# EAGLE board ALL_bord (EAGLE 9.6.2)
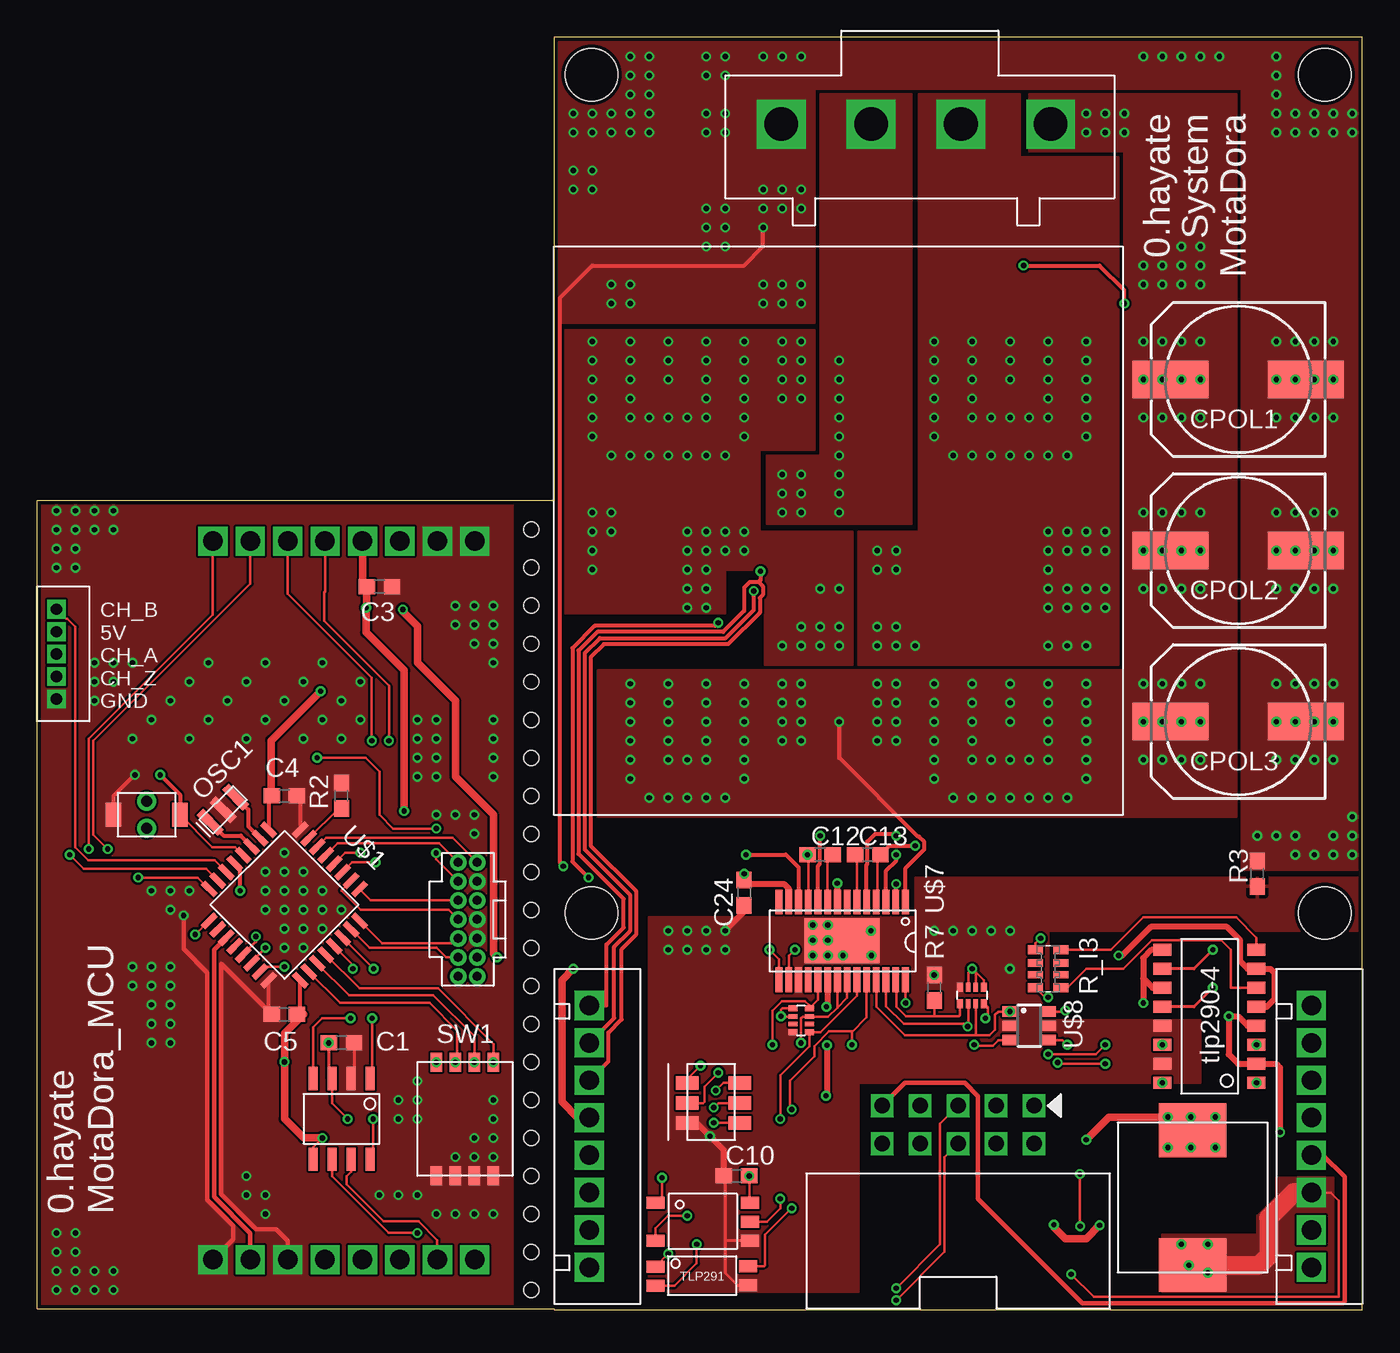
[diagram p0: board, top side]
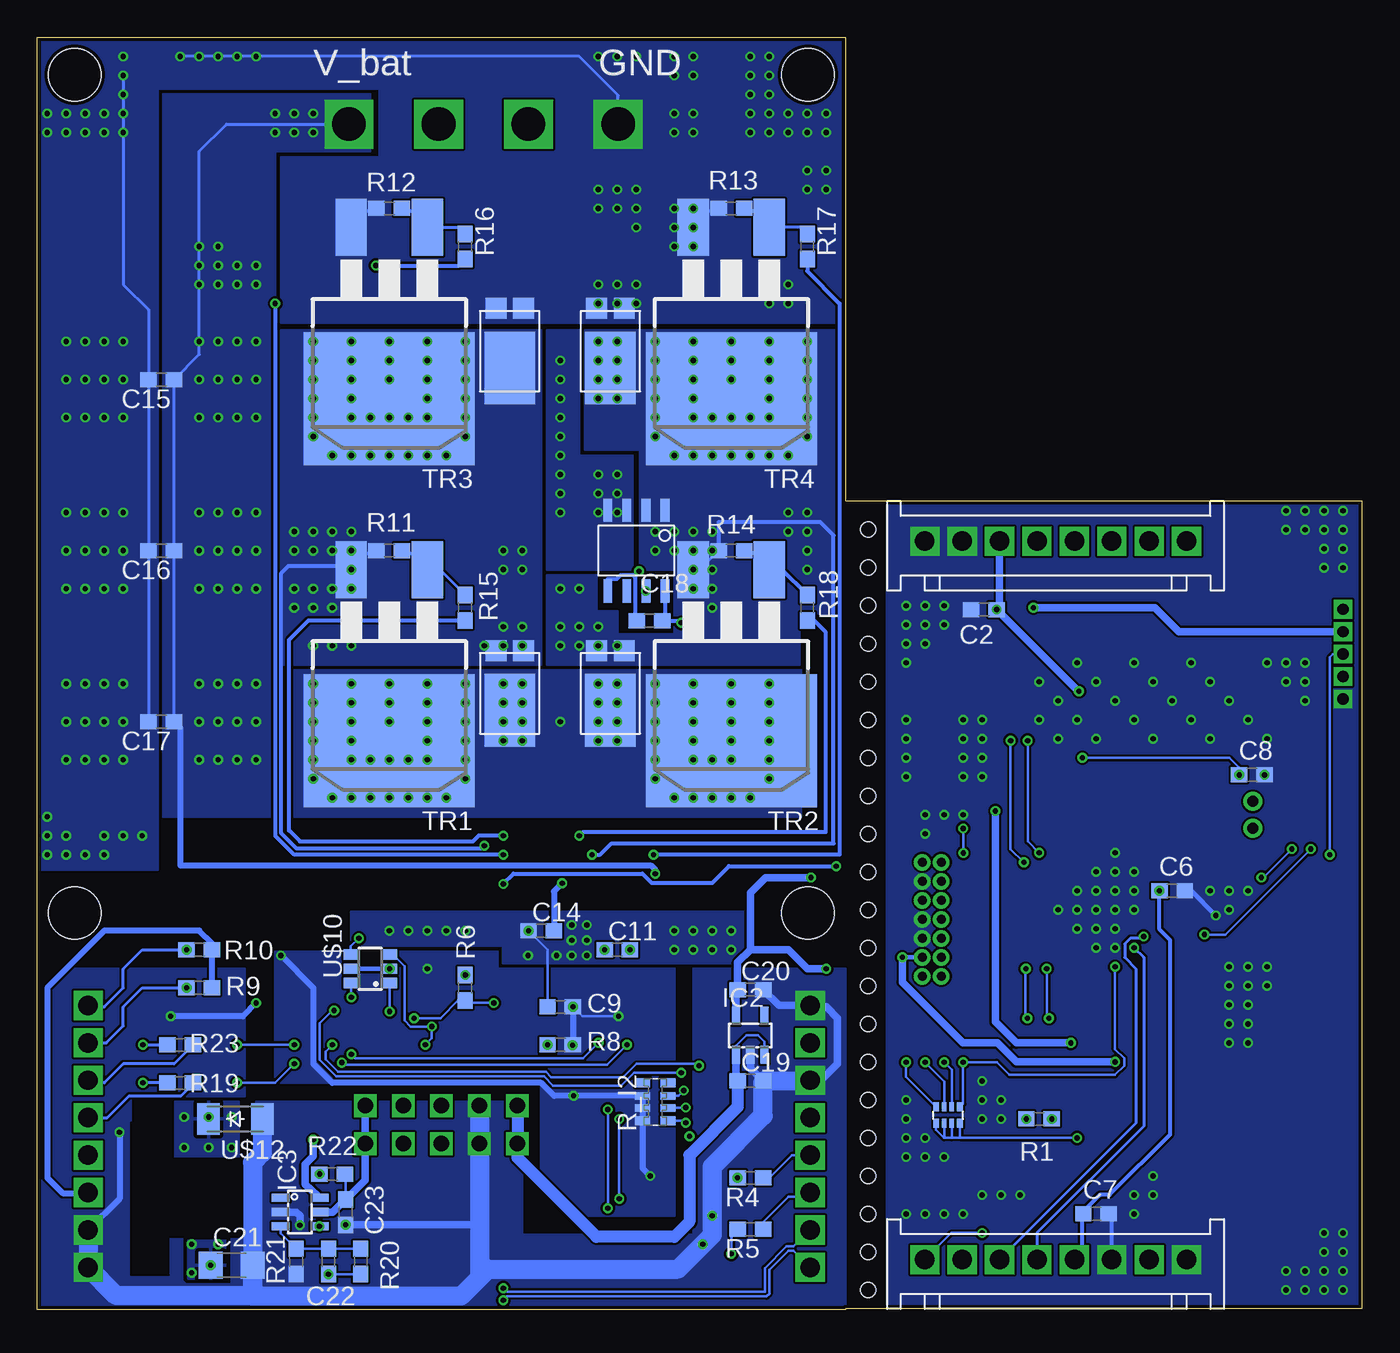
[diagram p1: board, bottom side, seen from below]

Size 88.54 x 85 mm. Coordinates in mm from the lower left corner, seen from the top.
Outline: 0,0.04 34.54,0.04 34.54,0 88.54,0 88.54,85 34.54,85 34.54,54.04 0,54.04 0,0.04
Copper layers (1*16): Top 0.035mm / dielectric 1.5mm / Bottom 0.035mm
Design rules "SeeedStudio_2layer_DRU_no_angle_20140221": minimum track width 6mil, minimum drill 12mil, track to track 6mil, track to pad 6mil, pad to pad 6mil, via to via 6mil, smd to smd 0mil, copper to edge 10mil, drill to drill 10mil, minimum pad ring 10mil, minimum via ring 6mil, stop-mask expansion 2mil, vias tented up to drill 100mil, thermal gap 10mil
Holes 3.5 mm at 86.04,82.5 37.04,82.5 37.04,26.5 86.04,26.5
Holes 1 mm at 33.02,52.11 33.02,49.57 33.02,47.03 33.02,44.49 33.02,41.95 33.02,39.41 33.02,36.87 33.02,34.33 33.02,31.79 33.02,29.25 33.02,26.71 33.02,24.17 33.02,21.63 33.02,19.09 33.02,16.55 33.02,14.01 33.02,11.47 33.02,8.93 33.02,6.39 33.02,3.85 33.02,1.31

## Footprints (pad centres in the part's own frame; a part is rotated, then mirrored left to right if it is on the bottom)
C1608 = smd 1.1 x 1: 1 -0.85,0; 2 0.85,0
C3216 = smd 1.6 x 1.8: 1 -1.4,0; 2 1.4,0
JQ_S8P = drill 1.3 square: P$1 2.5,2.7; P$2 5,2.7; P$3 7.5,2.7; P$4 10,2.7; P$5 12.5,2.7; P$6 15,2.7; P$7 17.5,2.7; P$8 20,2.7
JQ_P8P = drill 1.3 square: P$1 2.45,2.35; P$2 4.95,2.35; P$3 7.45,2.35; P$4 9.95,2.35; P$5 12.45,2.35; P$6 14.95,2.35; P$7 17.45,2.35; P$8 19.95,2.35
1014CAPA = smd 5.079 x 2.5: + 4.531,0; - -4.531,0
SOIC8 = smd 1.55 x 0.6: P$1 -2.7,1.905; P$2 -2.7,0.635; P$3 -2.7,-0.635; P$4 -2.7,-1.905; P$5 2.7,-1.905; P$6 2.7,-0.635; P$7 2.7,0.635; P$8 2.7,1.905
SOT23-5 = smd 0.55 x 1.2: 1 -0.95,-1.3; 2 0,-1.3; 3 0.95,-1.3; 4 0.95,1.3; 5 -0.95,1.3
SOT23-6 = smd 0.55 x 1.2: 1 -0.95,-1.3; 2 0,-1.3; 3 0.95,-1.3; 4 0.95,1.3; 5 0,1.3; 6 -0.95,1.3
TLP291 = smd 1.2 x 0.8: PIN1 0.411,-0.862; PIN2 0.411,-2.132; PIN3 6.601,-2.092; PIN4 6.601,-0.822
TLP290 = smd 0.8 x 1.2: 1_A 0,-6.3; 1_C 0,0; 1_E 1.27,0; 1_K 1.27,-6.3; 2_A 2.54,-6.3; 2_C 2.54,0; 2_E 3.81,0; 2_K 3.81,-6.3; 3_A 5.08,-6.3; 3_C 5.08,0; 3_E 6.35,0; 3_K 6.35,-6.3; 4_A 7.62,-6.3; 4_C 7.62,0; 4_E 8.89,0; 4_K 8.89,-6.3
SO6-5 = smd 1.2 x 0.8: 1 -3.125,1.27; 3 -3.125,-1.27; 4 3.175,-1.27; 5 3.175,0; 6 3.175,1.27
SMD_INDUCTOR = smd 3.6 x 4.5: P$1 0,0; P$2 9,0
CSTNE# = smd 0.6 x 1.95: P$1 0,0; P$2 1.2,0; P$3 2.4,0
1608 = smd 1.1 x 1: 1 -0.85,0; 2 0.85,0
1005X4RESISTOR = smd 0.4 x 0.6: 1 0.2,-0.8; 4 1.8,-0.8; 5 1.8,0.3; 8 0.2,0.3 | smd 0.3 x 0.6: 2 0.75,-0.8; 3 1.25,-0.8; 6 1.25,0.3; 7 0.75,0.3
0603X4RESISTOR = smd 0.6 x 1: 1 -1.275,-0.85; 4 1.275,-0.85; 5 1.275,0.85; 8 -1.275,0.85 | smd 0.5 x 1: 2 -0.4,-0.85; 3 0.4,-0.85; 6 0.4,0.85; 7 -0.4,0.85
DIPSW4 = smd 0.76 x 1.27: P$1 -1.27,-3.81; P$2 0,-3.81; P$3 1.27,-3.81; P$4 2.54,-3.81; P$5 2.54,3.79; P$6 1.27,3.79; P$7 0,3.79; P$8 -1.27,3.79
D2PACK = smd 2.083 x 3.81: 1 -2.54,-8.89; 3 2.54,-8.89 | smd 11.43 x 8.89: 2 0,2.54
LQFP32-7X7 = smd 1.2 x 0.4: 1 -4.3,2.8; 2 -4.3,2; 3 -4.3,1.2; 4 -4.3,0.4; 5 -4.3,-0.4; 6 -4.3,-1.2; 7 -4.3,-2; 8 -4.3,-2.8; 17 4.3,-2.8; 18 4.3,-2; 19 4.3,-1.2; 20 4.3,-0.4; 21 4.3,0.4; 22 4.3,1.2; 23 4.3,2; 24 4.3,2.8 | smd 0.4 x 1.2: 9 -2.8,-4.3; 10 -2,-4.3; 11 -1.2,-4.3; 12 -0.4,-4.3; 13 0.4,-4.3; 14 1.2,-4.3; 15 2,-4.3; 16 2.8,-4.3; 25 2.8,4.3; 26 2,4.3; 27 1.2,4.3; 28 0.4,4.3; 29 -0.4,4.3; 30 -1.2,4.3; 31 -2,4.3; 32 -2.8,4.3
TAKUTOSUITTI2 = drill 0.75: NC 2.225,-0.9; NC@2 2.225,0.9 | smd 1.05 x 1.6: P$1 0,0; P$2 4.45,0
CON_HEDA14P_1.27 = drill 0.6: 1 1.08,8.255; 2 2.35,8.255; 3 1.08,6.985; 4 2.35,6.985; 5 1.08,5.715; 6 2.35,5.715; 7 1.08,4.445; 8 2.35,4.445; 9 1.08,3.175; 10 2.35,3.175; 11 1.08,1.905; 12 2.35,1.905; 13 1.08,0.635; 14 2.35,0.635
ZH_5P = drill 0.75 square: PIN1 1.5,0; PIN2 3,0; PIN3 4.5,0; PIN4 6,0; PIN5 7.5,0
VL_4P = drill 2.25 square: P$1 3.75,-3.25; P$2 9.75,-3.25; P$3 15.75,-3.25; P$4 21.75,-3.25
TSSOP_28P_ALLEGRO = smd 5 x 3: PAD 4.906,1.942 | smd 0.45 x 1.65: PIN1 0.65,-0.65; PIN2 1.3,-0.65; PIN3 1.95,-0.65; PIN4 2.6,-0.65; PIN5 3.25,-0.65; PIN6 3.9,-0.65; PIN7 4.55,-0.65; PIN8 5.2,-0.65; PIN9 5.85,-0.65; PIN10 6.5,-0.65; PIN11 7.15,-0.65; PIN12 7.8,-0.65; PIN13 8.45,-0.65; PIN14 9.1,-0.65; PIN15 9.1,4.55; PIN16 8.45,4.55; PIN17 7.8,4.55; PIN18 7.15,4.55; PIN19 6.5,4.55; PIN20 5.85,4.55; PIN21 5.2,4.55; PIN22 4.55,4.55; PIN23 3.9,4.55; PIN24 3.25,4.55; PIN25 2.6,4.55; PIN26 1.95,4.55; PIN27 1.3,4.55; PIN28 0.65,4.55
SSOT6 = smd 0.69 x 0.99: 1 -0.95,-1.3; 2 0,-1.3; 3 0.95,-1.3; 4 0.95,1.3; 5 0,1.3; 6 -0.95,1.3
RGB_LED = smd 1.5 x 0.9: B_A 3.5,-2.7; B_K 0,-2.7; G_A 3.5,-1.35; G_K 0,-1.35; R_A 3.5,0; R_K 0,0
BOX10P-L = drill 1.02 square: P$1 5.08,2.54; P$2 5.08,0; P$3 2.54,2.54; P$4 2.54,0; P$5 0,2.54; P$6 0,0; P$7 -2.54,2.54; P$8 -2.54,0; P$9 -5.08,2.54; P$10 -5.08,0
SOD_123 = smd 1.5 x 2.1: A 1.8,0; K -1.8,0
POWERDI_5 = smd 1.39 x 1.4: 1 1.063,-0.177; 2 2.903,-0.177 | smd 3.36 x 4.86: 3 1.983,3.805

## Placement (x,y rotation side)
C1  0.1u  [C1608]  20.32,17.82 0 top
C2  10u  [C1608]  25.27,46.77 180 bottom
C3  10u  [C1608]  22.86,48.3 0 top
C4  0.1u  [C1608]  16.51,34.33 180 top
C5  4.7u  [C1608]  16.51,19.72 180 top
C6  1u  [C1608]  12.7,27.98 0 bottom
C7  10u  [C1608]  17.78,6.39 0 bottom
C8  0.1u  [C1608]  7.37,35.72 0 bottom
C9  0.1u  [C1608]  53.59,20.23 180 bottom
C10  0.1u  [C1608]  46.74,8.93 180 top
C11  1u  [C1608]  49.78,24.04 0 bottom
C12  0.22u  [C1608]  52.32,30.39 0 top
C13  0.22u  [C1608]  55.5,30.39 180 top
C14  10u  [C1608]  54.86,25.31 0 bottom
C15  0.1u  [C1608]  80.26,62.14 180 bottom
C16  0.1u  [C1608]  80.26,50.71 180 bottom
C17  0.1u  [C1608]  80.26,39.28 180 bottom
C18  0.1u  [C1608]  47.62,46.01 0 bottom
C19  4.7u  [C1608]  40.89,15.28 0 bottom
C20  2.2u  [C1608]  40.89,21.37 0 bottom
C21  100u  [C3216]  75.56,2.96 0 bottom
C22  1u  [C1608]  69.09,3.21 90 bottom
C23  2.2u  [C1608]  67.94,6.51 270 bottom
C24  0.1u  [C1608]  47.24,27.85 270 top
CON1  [JQ_S8P]  9.23,54.04 180 bottom
CON2  [JQ_S8P]  9.23,6.04 180 bottom
CON3  [JQ_P8P]  82.8,22.77 270 top
CON4  [JQ_P8P]  34.54,22.77 270 top
CPOL1  330u  [1014CAPA]  80.26,62.14 180 top
CPOL2  330u  [1014CAPA]  80.26,50.71 180 top
CPOL3  330u  [1014CAPA]  80.26,39.28 180 top
IC1  [SOIC8]  20.32,12.74 270 top
IC2  [SOT23-5]  40.89,18.32 0 bottom
IC3  [SOT23-6]  70.99,6.51 270 bottom
IC_1  [TLP291]  40.89,3.72 0 top
IC_2  [TLP290]  75.18,15.15 90 top
IC_3  [SO6-5]  44.45,5.88 0 top
L1  22u  [SMD_INDUCTOR]  77.22,11.98 270 top
OSC1  12M  [CSTNE#]  11.56,32.55 45 top
R1  10k  [1608]  21.59,12.74 180 bottom
R2  10k  [1608]  20.32,34.33 90 top
R3  0  [1608]  81.53,29.12 90 top
R4  1k  [1608]  40.89,8.8 180 bottom
R5  1k  [1608]  40.89,5.37 180 bottom
R6  2.4k  [1608]  59.94,21.5 90 bottom
R7  20k  [1608]  59.94,21.5 90 top
R8  33k  [1608]  53.59,17.69 0 bottom
R9  10k  [1608]  77.72,21.5 0 bottom
R10  10k  [1608]  77.72,24.04 0 bottom
R11  10k  [1608]  65.02,50.71 0 bottom
R12  10k  [1608]  65.02,73.57 0 bottom
R13  10k  [1608]  42.16,73.57 0 bottom
R14  10k  [1608]  42.16,50.71 0 bottom
R15  10  [1608]  59.94,46.9 90 bottom
R16  10  [1608]  59.94,71.03 90 bottom
R17  10  [1608]  37.08,71.03 90 bottom
R18  10  [1608]  37.08,46.9 90 bottom
R19  1k  [1608]  78.99,15.15 180 bottom
R20  3.3k  [1608]  66.93,3.21 270 bottom
R21  2k  [1608]  71.25,3.21 90 bottom
R22  10k  [1608]  68.83,9.05 0 bottom
R23  1k  [1608]  78.99,17.69 180 bottom
R_I1  [1005X4RESISTOR]  26.67,12.74 180 bottom
R_I2  [0603X4RESISTOR]  47.24,13.88 90 bottom
R_I3  [0603X4RESISTOR]  67.56,22.77 270 top
R_I4  10k  [1005X4RESISTOR]  50.8,18.32 90 top
R_I5  10k  [1005X4RESISTOR]  61.47,21.25 0 top
SW1  [DIPSW4]  27.94,12.74 0 top
TR1  [D2PACK]  65.02,40.55 180 bottom
TR2  [D2PACK]  42.16,40.55 180 bottom
TR3  [D2PACK]  65.02,63.41 180 bottom
TR4  [D2PACK]  42.16,63.41 180 bottom
U$1  STM32F303K_32LQFP  [LQFP32-7X7]  16.51,27.04 315 top
U$2  TAKUTOSUITTI2  [TAKUTOSUITTI2]  5.08,33.06 0 top
U$3  BOX14P  [CON_HEDA14P_1.27]  30.48,30.52 180 top
U$4  ZH_5P  [ZH_5P]  1.27,48.3 270 top
U$5  ACS711  [SOIC8]  48.51,50.71 270 bottom
U$6  VL_4P  [VL_4P]  45.97,82.46 0 top
U$7  A3921  [TSSOP_28P_ALLEGRO]  58.67,26.58 180 top
U$8  FDC6305  [SSOT6]  66.29,18.96 270 top
U$9  RGB_LED  [RGB_LED]  43.43,15.15 0 top
U$10  FDC6305  [SSOT6]  66.29,22.77 90 bottom
U$11  BOX10PBOX10P-L  [BOX10P-L]  61.54,11.09 0 top
U$12  ss2040  [SOD_123]  75.31,12.74 0 bottom
U$13  HS38382  [38X38SQ]  34.54,71.03 270 top
U$14  SBR15U30SP5  [POWERDI_5]  54.99,43.85 180 bottom
U$15  SBR15U30SP5  [POWERDI_5]  54.99,66.71 180 bottom
U$16  SBR15U30SP5  [POWERDI_5]  48.26,66.71 180 bottom
U$17  SBR15U30SP5  [POWERDI_5]  48.26,43.85 180 bottom

## Library data of the parts
C1-C24 = rcl; SPICEPREFIX: C
CON1-CON4 U$3 U$4 U$6 U$11 = user_conector
CPOL1-CPOL3 L1 R1-R23 R_I1-R_I5 = user_rcl
IC1-IC3 IC_1-IC_3 U$1 U$5 U$7 = user_ic
OSC1 = user_osc
SW1 U$2 = user_swich
TR1-TR4 U$8 U$10 = user_tr_fet_igbt
U$9 = user_leds
U$12 U$14-U$17 = user_diode
U$13 = user_heatshink

## Nets
5V: C19.1 CON3.P$5 IC2.1 IC2.3 U$11.P$9 U$11.P$10
12V: C23.1 IC3.5 R22.2 U$11.P$1 U$11.P$2
+3V1: C21.1 C22.1 CON3.P$6 L1.P$2 R9.2 R10.2 R20.2
+3V3: C2.1 C4.2 C5.1 CON1.P$6 IC1.P$5 R_I1.5 R_I1.6 R_I1.7 R_I1.8 U$1.1 U$1.17 U$3.3
+5V: C1.1 C3.1 CON1.P$5 IC1.P$3 R1.1 U$4.PIN2
A_CH: U$1.7 U$4.PIN3
B_CH: U$1.6 U$4.PIN1
CAN_N: CON2.P$8 IC1.P$6
CAN_N1: CON4.P$8 U$11.P$6
CAN_P: CON2.P$7 IC1.P$7
CAN_P1: CON4.P$7 U$11.P$5
CAN_RX: IC1.P$4 U$1.21
CAN_TX: IC1.P$1 U$1.22
COAST: CON1.P$3 U$1.28
COAST1: IC_2.2_C R_I4.3 U$7.PIN21 U$7.PIN22
COAST_IN: CON3.P$3 R23.1
DIR: CON1.P$4 U$1.27
DIR1: IC_2.1_C R_I4.4 U$7.PIN19
DIR_IN: CON3.P$4 R19.1
FF1: CON1.P$2 U$1.8
FF1_IN: CON3.P$2 IC_2.3_C R9.1
FF1O: IC_2.3_K R_I3.5
FF2: CON1.P$1 U$1.9
FF2_IN: CON3.P$1 IC_2.4_C R10.1
FF2O: IC_2.4_K R_I3.8
FF3: R_I5.2 U$7.PIN26 U$8.3 U$10.3
FF4: R_I5.3 U$7.PIN25 U$8.1 U$10.1
GHA: R18.1 U$7.PIN10
GHB: R15.1 U$7.PIN5
GLA: R17.1 U$7.PIN12
GLB: R16.1 U$7.PIN3
GND: C1.2 C2.2 C3.2 C4.1 C5.2 C6.2 C7.2 C8.2 CON1.P$7 CON1.P$8 CON2.P$1 CON2.P$3 IC1.P$2 OSC1.P$2 R2.2 SW1.P$1 SW1.P$2 SW1.P$3 SW1.P$4 U$1.16 U$1.32 U$2.P$1 U$3.5 U$3.7 U$3.11 U$4.PIN5
GND1: C15.2 C16.2 C17.2 CPOL1.- CPOL2.- CPOL3.- R3.2 R12.1 R13.1 TR3.3 TR4.3 U$6.P$1 U$7.PIN2 U$15.1 U$15.2 U$16.1 U$16.2
GNDI: C9.2 C10.2 C14.1 C24.2 IC_1.PIN3 IC_2.1_E IC_2.2_E IC_3.4 R3.1 R6.2 R7.2 R_I4.8 R_I5.8 U$7.PAD U$7.PIN17 U$8.2 U$8.5 U$9.B_K U$10.2 U$10.5
GNDINT: C18.1 C19.2 C20.2 C21.2 C23.2 CON3.P$7 CON3.P$8 CON4.P$1 CON4.P$3 IC2.2 IC3.2 IC_1.PIN2 IC_2.1_K IC_2.2_K IC_2.3_E IC_2.4_E IC_3.3 R21.1 U$5.P$5 U$11.P$7 U$11.P$8 U$12.A
ID1: R_I1.1 SW1.P$8 U$1.15
ID2: R_I1.2 SW1.P$7 U$1.18
ID3: R_I1.3 SW1.P$6 U$1.19
ID4: R_I1.4 SW1.P$5 U$1.20
M: U$5.P$3 U$5.P$4 U$6.P$2
N$1: OSC1.P$1 U$1.3
N$2: OSC1.P$3 U$1.2
N$3: R2.1 U$1.31
N$4: U$8.6 U$9.G_K
N$5: U$8.4 U$9.R_K
N$6: IC3.6 L1.P$1 U$12.K
N$7: IC1.P$8 R1.2
N$8: R_I2.1 U$9.B_A
N$9: R_I2.2 U$9.G_A
N$10: R_I2.3 U$9.R_A
N$11: R_I3.1 U$10.4
N$12: R_I3.4 U$10.6
N$13: IC_3.1 R4.2
N$16: IC_1.PIN1 R5.2
N$17: IC_2.1_A R19.2
N$18: IC_2.2_A R23.2
N$19: C11.1 U$7.PIN16
N$20: C11.2 U$7.PIN15
N$21: C12.2 U$7.PIN9
N$22: C13.2 U$7.PIN6
N$23: C14.2 U$7.PIN8
N$24: C22.2 IC3.3 R20.1 R21.2
N$25: R13.2 R17.2 TR4.1
N$26: R14.2 R18.2 TR2.1
N$27: R11.2 R15.2 TR1.1
N$28: R12.2 R16.2 TR3.1
N$31: IC3.4 R22.1
NRST: C8.1 U$1.4 U$2.P$2 U$3.12
PWM: CON2.P$5 U$1.14
PWM1: IC_3.5 R_I4.1 U$7.PIN23
PWM_IN: CON4.P$5 R4.1
RDEAD: R7.1 R_I5.1 U$7.PIN27
RESET: CON2.P$6 U$1.13
RESET1: IC_1.PIN4 R8.1 U$7.PIN24
RESET_IN: CON4.P$6 R5.1
SA: C12.1 R14.1 TR2.3 TR4.2 U$5.P$1 U$5.P$2 U$7.PIN11 U$16.3 U$17.1 U$17.2
SB: C13.1 R11.1 TR1.3 TR3.2 U$6.P$3 U$7.PIN4 U$14.1 U$14.2 U$15.3
SENS_VCC: C18.2 C20.1 CON4.P$4 IC2.5 U$5.P$8
T_JCLK/SWCLK: U$1.24 U$3.6
T_JTDI: U$1.25 U$3.10
T_JTDO/SWO: U$1.26 U$3.8
T_JTMS/SWDIO: U$1.23 U$3.4
T_VCP_RX: U$1.30 U$3.13
T_VCP_TX: U$1.29 U$3.14
V5: C9.1 C10.1 IC_2.3_A IC_2.4_A IC_3.6 R8.2 R_I2.6 R_I2.7 R_I2.8 R_I4.5 R_I4.6 R_I5.5 R_I5.6 R_I5.7 U$7.PIN20
VDD: C15.1 C16.1 C17.1 C24.1 CPOL1.+ CPOL2.+ CPOL3.+ TR1.2 TR2.2 U$6.P$4 U$7.PIN1 U$7.PIN13 U$14.3 U$17.3
VDDA: C6.1 C7.1 CON2.P$4 U$1.5
VDSTH: R6.1 R_I5.4 U$7.PIN28
VIOUT: CON2.P$2 U$1.11
VIOUT1: CON4.P$2 U$5.P$7

## Tracks (layer width: path | path; a pad name or v marks a point on that pad's centre or on a via)
5V
  Top 0.305: U$11.P$9 57.99,15.15 61.98,15.15 62.87,14.27 62.87,7.4 69.85,0.42 87.25,0.42 87.38,0.55 87.38,8.86 85.92,10.32 CON3.P$5
  Bottom 0.152: IC2.3 39.94,17.88 40.39,18.32 41.15,18.32 41.84,17.63 IC2.1 | C19.1 41.74,15.37 41.84,15.47
  Bottom 0.508: 41.84,15.47 IC2.1
  Bottom 0.813: C19.1 41.74,13.54 44.96,10.32 44.96,5.88 45.97,4.86 51.18,4.86 56.46,10.15 U$11.P$10 U$11.P$9
12V
  Bottom 0.152: R22.2 67.94,9.02 C23.1
  Bottom 0.508: U$11.P$1 U$11.P$2 66.62,8.65 67.91,7.36 C23.1 68.8,6.51 IC3.5
+3V1  (via drill 0.35)
  Top 0.152: 78.49,2.98 L1.P$2 77.2,2.96 v76.96,2.96 | v69.09,2.36 70.61,0.84 87,0.84 87,7.28 86.45,7.82 CON3.P$6
  Top 1.27: 78.49,2.98 81.68,2.98 82.3,3.59 82.3,6.13 83.98,7.82 CON3.P$6
  Bottom 0.152: C21.1 v76.96,2.96 | v69.09,2.36 R20.2
  Bottom 0.406: R9.2 R10.2 76.87,24.46 77.72,25.31 84.07,25.31 87.88,21.5 87.88,8.8 86.86,7.78 85.19,7.78 CON3.P$6
  other vias: 78.23,4.35 78.23,2.45 76.45,4.35
  pour Bottom: 78.49,4.61 78.49,2.07 76.2,2.07 75.95,2.32 75.95,4.61
  pour Top (no thermals): 82.8,8.8 86.61,8.8 86.61,1.18 75.18,1.18 75.18,4.99 81.53,4.99 81.53,6.26 82.8,7.53
+3V3  (via drill 0.35)
  Top 0.152: v19.05,11.47 18.41,10.83 IC1.P$5
  Top 0.254: C4.2 15.58,34.24 15.45,34.12 U$1.1 | C5.1 17.57,19.93 U$1.17
  Top 0.305: 17.78,19.72 C5.1
  Top 0.508: 15.58,34.24 15.62,34.29 15.62,38.01 v18.92,41.31 | 17.78,19.72 16.51,18.45 v16.51,16.55 16.51,12.74 17.78,11.47 v19.05,11.47 | C2.1 24.42,46.65 25.4,45.67 25.4,43.22 27.94,40.68 27.94,35.6 30.48,33.06 30.48,23.78 v30.73,23.53
  Bottom 0.152: R_I1.5 28.47,12 27.94,11.47 | 27.94,11.47 27.92,11.49 R_I1.6 | 26.8,11.47 27.43,11.47 | 27.43,11.47 27.94,11.47 | R_I1.7 27.43,12.43 27.43,11.47 | R_I1.8 26.87,11.54 26.8,11.47 | 26.8,11.47 v19.05,11.47
  Bottom 0.305: U$3.3 v30.73,23.53
  Bottom 0.508: CON1.P$6 24.23,46.97 C2.1 18.96,41.31 v18.92,41.31 | v16.51,16.55 23.11,16.55 24.38,17.82 26.67,17.82 30.73,21.88 v30.73,23.53
  other vias: 24.42,46.77
+5V  (via drill 0.35)
  Top 0.152: R1.1 19.68,13.79 19.68,15.28 IC1.P$3
  Top 0.203: C1.1 19.47,15.49 19.68,15.28
  Top 0.508: CON1.P$5 21.73,48.58 C3.1 22.01,46.9 v21.97,46.9 21.97,45.25 24.51,42.71 v24.51,33.31
  Bottom 0.508: U$4.PIN2 12.24,45.3 13.84,46.9 v21.97,46.9 | C1.1 23.11,17.82 24.51,19.21 v24.51,33.31
  other vias: 20.74,12.74 19.47,17.82
A_CH  (via drill 0.35)
  Top 0.152: v2.16,30.39 3.1,29.45 11.27,29.45 U$1.7
  Bottom 0.152: v2.16,30.39 2.16,43.6 1.96,43.8 U$4.PIN3
B_CH
  Top 0.152: U$4.PIN1 1.91,46.16 1.99,46.16 2.54,45.61 2.54,30.87 3.4,30.01 11.43,30.01 11.73,30.01 11.84,30.01 U$1.6
CAN_N  (via drill 0.35)
  Top 0.152: IC1.P$6 19.68,8.92 23.49,5.12 v25.4,5.12
  Bottom 0.152: CON2.P$8 27.45,5.12 v25.4,5.12
CAN_N1  (via drill 0.35)
  Top 0.152: v57.4,0.62 60.63,3.85 60.63,10.17 U$11.P$6
  Bottom 0.152: CON4.P$8 37.99,3.92 38.35,3.92 39.62,2.65 39.62,1.05 39.8,0.88 57.15,0.88 v57.4,0.62
CAN_P
  Top 0.152: IC1.P$7 20.95,9.22 20.66,8.92 20.66,8.38 23.13,5.91 25.47,5.91 26.73,4.64 CON2.P$7
CAN_P1  (via drill 0.35)
  Top 0.152: v57.4,1.43 60.33,4.35 60.33,12.41 U$11.P$5
  Bottom 0.152: CON4.P$7 37.99,4.22 38.48,4.22 39.93,2.77 39.93,1.18 57.15,1.18 v57.4,1.43
CAN_RX  (via drill 0.35)
  Top 0.152: U$1.21 21.08,23.03 v21.08,22.77 | v20.93,19.47 19.02,19.47 18.41,18.86 IC1.P$4
  Bottom 0.152: v21.08,22.77 21.08,19.47 v20.93,19.47
CAN_TX  (via drill 0.35)
  Top 0.152: U$1.22 v22.47,22.77 v22.48,22.77 | v22.38,19.47 22.38,15.59 IC1.P$1
  Bottom 0.152: v22.48,22.77 22.5,22.74 22.5,19.59 v22.38,19.47
COAST  (via drill 0.35)
  Top 0.152: U$1.28 20.56,30.52 v21.59,30.52 | v22.35,38.01 22.35,42.2 16.73,47.82 CON1.P$3
  Bottom 0.152: v21.59,30.52 22.35,31.28 v22.35,38.01
COAST1  (via drill 0.35)
  Top 0.152: 53.47,20.17 U$7.PIN21 | U$7.PIN22 54.12,20.82 53.47,20.17 | 53.47,20.17 52.85,19.55 51.63,19.55 R_I4.3 51.16,19.57 51.04,19.46 v51.04,17.82 | v67.56,17.05 70.74,17.05 v71.37,17.69
  Bottom 0.152: v51.04,17.82 52.06,16.8 67.31,16.8 v67.56,17.05 | v71.37,17.69 IC_2.2_C
  other vias: 75.18,17.69
COAST_IN
  Bottom 0.203: R23.1 79.41,16.42 82.8,16.42 84.07,15.15 84.98,15.15 CON3.P$3
DIR  (via drill 0.35)
  Top 0.152: U$1.27 21.05,29.88 v22.61,29.88 | CON1.P$4 19.23,47.97 19.18,47.92 19.18,46.01 23.5,41.69 v23.5,38.01
  Bottom 0.152: v23.5,38.01 23.5,30.77 v22.61,29.88
DIR1  (via drill 0.35)
  Top 0.152: U$7.PIN19 52.17,20.7 R_I4.4 51.6,20.32 51.31,20.61 49.78,20.61 49.15,19.98 49.15,17.7 v49.14,17.69 | v71.37,16.42 68.28,16.42 v68.2,16.5
  Bottom 0.152: v68.2,16.5 68.07,16.37 50.46,16.37 v49.14,17.69 | IC_2.1_C 72.64,15.15 v71.37,16.42
  other vias: 75.18,15.15
DIR_IN
  Bottom 0.203: CON3.P$4 83.86,12.82 82.42,14.27 78.94,14.27 78.14,15.06 R19.1
FF1  (via drill 0.35)
  Top 0.152: v4.7,30.77 3.73,31.74 3.73,38.01 14.23,48.51 CON1.P$2 | U$1.8 10.72,28.87 v6.73,28.87
  Bottom 0.152: v6.73,28.87 6.6,28.87 v4.7,30.77
FF1_IN  (via drill 0.35)
  Top 0.203: R9.1 77.3,20.23 IC_2.3_C
  Bottom 0.203: CON3.P$2 83.94,17.82 82.8,18.96 82.8,20.23 81.53,21.5 R9.1
  other vias: 78.57,21.5
FF1O
  Top 0.152: R_I3.5 68.83,21.49 70.1,22.77 72.59,22.77 74.49,24.67 79.13,24.67 79.76,24.04 79.76,21.5 IC_2.3_K
FF2  (via drill 0.35)
  Top 0.152: CON1.P$1 11.73,46.44 3.43,38.14 v3.43,30.77 | U$1.9 11.46,25.98 v10.54,25.06
  Bottom 0.152: v10.54,25.06 9.14,25.06 v3.43,30.77
FF2_IN  (via drill 0.35)
  Top 0.203: R10.1 77.3,22.77 IC_2.4_C
  Bottom 0.203: CON3.P$1 85.06,20.23 84.07,20.23 82.8,21.5 82.8,22.77 81.53,24.04 R10.1
  other vias: 78.57,24.04
FF2O
  Top 0.152: R_I3.8 71.76,24.04 73.91,26.2 80.14,26.2 81.48,24.85 IC_2.4_K
FF3  (via drill 0.35)
  Top 0.152: U$7.PIN26 56.72,20.27 57.91,19.09 62.23,19.09 | 62.23,19.09 62.23,20.43 R_I5.2 | 62.23,19.09 62.23,18.96 v62.18,18.91 | U$8.3 64.23,18.01 63.85,17.63 62.67,17.63 v62.61,17.69
  Bottom 0.152: U$10.3 64.78,23.72 64.01,22.95 64.01,19.32 63.6,18.91 v62.18,18.91 62.18,18.12 v62.61,17.69
FF4  (via drill 0.35)
  Top 0.152: U$7.PIN25 56.07,20.23 57.98,18.32 62.74,18.32 | 62.74,18.32 62.74,20.43 R_I5.3 | U$8.1 64.23,19.91 64.01,19.69 64.01,18.71 63.63,18.32 62.74,18.32
  Bottom 0.152: U$10.1 U$8.1
  other vias: 64.99,19.91
GHA  (via drill 0.35)
  Top 0.254: U$7.PIN10 52.17,29.64 52.3,29.77 52.3,31.64 v52.32,31.66
  Bottom 0.254: v52.32,31.66 52.07,31.91 35.84,31.91 35.84,45.25 36.64,46.05 R18.1
GHB  (via drill 0.35)
  Top 0.254: U$7.PIN5 55.42,29.72 55.48,29.77 55.48,31.26 56.01,31.79 57.28,31.79 v57.4,31.66
  Bottom 0.254: v57.4,31.66 59.05,31.66 59.44,31.28 70.99,31.28 71.73,32.02 71.73,44.74 70.42,46.05 R15.1
GLA  (via drill 0.35)
  Top 0.254: U$7.PIN12 50.87,29.54 50.03,30.39 v47.37,30.39
  Bottom 0.254: R17.1 37.08,69.38 34.92,67.22 34.92,30.39 v47.37,30.39
GLB  (via drill 0.35)
  Top 0.254: U$7.PIN3 56.72,29.32 57.4,30 v57.4,30.39 | v72.64,67.22 72.64,68.11 70.99,69.76 v65.91,69.76
  Bottom 0.254: v57.4,30.39 71.37,30.39 72.64,31.66 v72.64,67.22 | v65.91,69.76 60.36,69.76 R16.1
GND  (via drill 0.35)
  Top 0.203: C1.2 21.17,15.65 IC1.P$2
  Top 0.254: C8.2 5.08,34.29 U$2.P$1 | C4.1 17.57,34.12 U$1.32 | C5.2 15.45,19.93 U$1.16
  Top 0.305: CON2.P$1 13.08,4.69 13.08,5.61 11.35,7.34 11.35,22.52 9.78,24.09 v9.78,26.33 | CON2.P$3 16.73,4.61 15.97,5.37 14.62,5.37 12.27,7.72 12.27,23.11 C5.2
  Bottom 0.254: C7.2 16.73,6.19 CON2.P$3
  Bottom 0.305: v9.78,26.33 11.43,27.98 C6.2
  other vias: 6.52,35.72 1.27,53.38 2.54,53.38 3.81,53.38 5.08,53.38 5.08,52.11 3.81,52.11 2.54,52.11 1.27,52.11 1.27,50.84 2.54,50.84 2.54,49.57 1.27,49.57 13.97,38.14 15.24,39.41 17.78,38.14 19.05,39.41 20.32,38.14 21.59,39.41 26.67,39.41 26.67,33.06 29.21,31.79 26.67,35.6 29.21,33.06 27.94,33.06 25.4,7.66 24.13,7.66 22.86,7.66 26.67,6.39 27.94,6.39 29.21,6.39 30.48,6.39 15.24,6.39 15.24,7.66 13.97,7.66 13.97,8.93 5.08,2.58 5.08,1.31 3.81,1.31 2.54,1.31 1.27,1.31 1.27,2.58 1.27,3.85 1.27,5.12 2.54,5.12 2.54,3.85 2.54,2.58 3.81,2.58 7.62,17.82 8.89,17.82 8.89,19.09 7.62,19.09 8.89,20.36 7.62,20.36 7.62,21.63 8.89,21.63 8.89,22.9 7.62,22.9 6.35,22.9 6.35,21.63 16.51,24.17 17.78,24.17 19.05,25.44 20.32,26.71 19.05,26.71 17.78,25.44 16.51,25.44 16.51,26.71 17.78,26.71 15.24,26.71 15.24,27.98 16.51,27.98 17.78,27.98 19.05,27.98 17.78,29.25 16.51,29.25 15.24,29.25 16.51,30.52 21.59,41.95 26.67,38.14 25.4,38.14 25.4,36.87 25.4,35.6 26.67,36.87 7.62,27.98 8.89,27.98 10.16,27.98 8.89,26.71 6.35,38.14 7.62,39.41 8.89,40.68 10.16,41.95 11.43,43.22 10.16,38.14 11.43,39.41 12.7,40.68 13.97,41.95 15.24,43.22 16.51,40.68 17.78,41.95 19.05,43.22 20.32,40.68 27.94,47.03 29.21,47.03 30.48,47.03 30.48,45.76 30.48,44.49 30.48,43.22 29.21,44.49 29.21,45.76 27.94,45.76 30.48,39.41 30.48,38.14 30.48,36.87 30.48,35.6 24.13,12.74 24.13,14.01 25.4,12.74 25.4,14.01 25.4,15.28 27.94,10.2 29.21,10.2 30.48,10.2 30.48,11.47 29.21,11.47 30.48,12.74 30.48,14.01 25.4,39.41 3.81,40.68 3.81,41.95 3.81,43.22 5.08,41.95 6.35,43.22 5.08,43.22
  pour Top (no thermals): 0.13,53.88 31.75,53.88 31.75,0.16 0.13,0.16
  pour Bottom (no thermals): 0.13,53.88 31.75,53.88 31.75,0.16 0.13,0.16
GND1  (via drill 0.35)
  Top 0.254: U$7.PIN2 57.37,28.41 v57.4,28.44 | v35.16,29.63 34.92,29.86 34.92,67.6 37.08,69.76 47.24,69.76 48.51,71.03 v48.51,72.3
  Bottom 0.203: U$6.P$1 49.72,81.13 52.32,83.73 v73.91,83.73 v75.18,83.73 v76.45,83.73 v77.72,83.73 v78.99,83.73 | v82.8,82.46 v82.8,81.19 v82.8,79.92 v82.8,78.65 82.8,68.49 81.11,66.8 C15.2 C16.2 C17.2 | R13.1 43.43,73.57 TR4.3 | R12.1 66.29,73.57 TR3.3
  Bottom 0.254: v57.4,28.44 56.72,29.12 48.1,29.12 47.49,28.51 43.43,28.51 42.32,29.63 v35.16,29.63
  other vias: 87.88,79.92 87.88,78.65 86.61,78.65 86.61,79.92 85.34,78.65 84.07,78.65 84.07,79.92 85.34,79.92 82.8,83.73 51.05,83.73 49.78,83.73 48.51,83.73 45.97,83.73 45.97,82.46 45.97,79.92 45.97,78.65 48.51,74.84 49.78,74.84 51.05,74.84 44.7,78.65 44.7,79.92 44.7,82.46 44.7,83.73 35.81,76.11 37.08,76.11 40.89,78.65 39.62,78.65 38.35,78.65 37.08,78.65 35.81,78.65 35.81,79.92 37.08,79.92 38.35,79.92 39.62,79.92 40.89,79.92 39.62,81.19 39.62,82.46 39.62,83.73 40.89,83.73 40.89,82.46 40.89,81.19 38.35,68.49 38.35,67.22 39.62,67.22 39.62,68.49 48.51,67.22 49.78,67.22 51.05,67.22 51.05,68.49 49.78,68.49 48.51,68.49 82.8,64.68 84.07,64.68 85.34,64.68 86.61,64.68 86.61,62.14 85.34,62.14 84.07,62.14 82.8,62.14 82.8,59.6 84.07,59.6 85.34,59.6 86.61,59.6 82.8,53.25 84.07,53.25 85.34,53.25 86.61,53.25 86.61,50.71 85.34,50.71 84.07,50.71 82.8,50.71 82.8,48.17 84.07,48.17 85.34,48.17 86.61,48.17 86.61,41.82 85.34,41.82 84.07,41.82 82.8,41.82 82.8,39.28 84.07,39.28 85.34,39.28 86.61,39.28 86.61,36.74 85.34,36.74 84.07,36.74 82.8,36.74 81.53,31.66 82.8,31.66 84.07,31.66 84.07,30.39 86.61,31.66 86.61,30.39 87.88,30.39 87.88,31.66 44.7,72.3 85.34,30.39 87.88,32.93 48.51,73.57 49.78,73.57 51.05,73.57 45.97,73.57 45.97,72.3 45.97,71.03 44.7,71.03 44.7,73.57 37.08,74.84 35.81,74.84
  pour Top (no thermals): 89.15,29.37 80.52,29.37 80.52,85 89.15,85
  pour Bottom (no thermals): 89.15,85 89.15,29.37 80.52,29.37 80.52,85
  pour Bottom (no thermals): 82.68,85 34.54,85 34.54,65.95 72.26,65.95 72.26,77 65.66,77 65.66,81.57 82.68,81.57
  pour Top (no thermals): 82.8,85 34.54,85 34.54,65.95 51.94,65.95 51.94,81.57 82.8,81.57
GNDI  (via drill 0.35)
  Top 0.203: C10.2 45.97,8.84 45.97,4.61 | IC_1.PIN3 46.8,1.63 45.97,2.45 45.97,4.61 | IC_3.4 45.97,4.61
  Top 0.406: U$9.B_K 44.09,12.45 v44.95,11.59 45.89,10.65 C10.2 | C14.1 55.04,24.64 U$7.PAD | C24.2 47.24,26.58 v45.97,25.31
  Bottom 0.152: C9.2 54.44,24.04 C14.1
  Bottom 0.305: U$10.5 U$10.2
  other vias: 59.94,22.35 55.71,25.31 42.16,25.31 42.16,24.04 43.43,24.04 43.43,25.31 44.7,25.31 44.7,24.04 45.97,24.04 51.82,25.69 51.82,24.68 51.82,23.66 52.83,25.69 52.83,24.68 52.83,23.66 53.85,23.66 55.75,23.66 59.94,25.31 61.21,25.31 62.48,25.31 63.75,25.31 65.02,25.31 64.99,22.77
  pour Top (no thermals): 40.89,1.18 54.86,1.18 54.86,15.15 77.72,15.15 77.72,19.34 67.56,19.34 67.56,26.2 40.89,26.2
  pour Bottom (no thermals): 67.56,26.58 40.89,26.58 40.89,23.28 40.77,23.15 57.4,23.15 57.4,24.29 67.56,24.29
  pour Top: 89.15,28.87 58.67,28.87 58.67,25.31 89.15,25.31
GNDINT  (via drill 0.35)
  Top 0.152: IC_3.3 41.33,5.42 42.16,6.26 v43.43,6.26 | IC_1.PIN2 42.57,1.59 44.07,3.08 v44.07,4.35
  Top 0.254: CON4.P$1 38.04,20.32 38.04,24.38 39.18,25.53 39.18,27.43 36.17,30.44 36.17,44.02 37.42,45.27 45.84,45.27 47.24,46.68 47.24,48.23 47.63,48.62 48.19,48.62 | CON4.P$3 38.16,16.59 38.16,18.49 39.05,19.38 39.05,24.08 40.01,25.04 40.01,27.98 36.98,31 36.98,43.57 37.87,44.46 46.17,44.46 48.28,46.57 48.28,47.56 48.49,47.76 48.49,48.32 48.19,48.62 | v48.34,49.33 48.34,48.76 48.19,48.62
  Top 0.406: IC_2.4_E 74.47,24.04 73.91,23.48 73.91,22.13 | 73.91,22.13 74.55,21.5 IC_2.3_E | 73.91,22.13 v73.91,20.48 | IC_2.2_K 80.9,18.96 80.26,19.59 v79.63,19.59 79.63,17.05 80.26,16.42 IC_2.1_K 82.8,16.42 83.06,16.17 v83.06,11.85
  Top 0.508: v70.99,5.62 70.1,4.74 68.71,4.74 67.94,5.5 C23.2
  Bottom 0.254: U$5.P$5 50.42,48.8 49.82,48.8 49.56,49.06 48.73,49.06 48.57,48.9 | C18.1 48.57,46.11 48.57,48.9 | 48.57,48.9 48.57,49.1 v48.34,49.33
  Bottom 0.406: v73.91,20.48 74.8,19.59 v79.63,19.59 | v83.06,11.85 83.06,7.42 CON3.P$7
  Bottom 0.508: 73.41,12.63 U$12.A | IC2.2 40.89,16.13 C19.2 | C20.2 38.99,20.32 CON4.P$1 36.8,20.23 35.81,20.23 35.05,19.47 35.05,16.42 36.2,15.28 36.94,15.28 | IC3.2 71.25,6.51 70.99,6.26 v70.99,5.62 | C23.2 59,5.66 U$11.P$8
  Bottom 1.27: CON3.P$7 CON3.P$8 83.26,0.93 74.17,0.93 C21.2 | 67.85,0.9 67.86,0.89 | 67.86,0.89 74.17,0.89 C21.2 | CON4.P$3 36.94,15.28 C19.2 40.04,12.93 43.43,9.54 v43.43,6.26 43.43,4.99 v44.07,4.35 45.72,2.7 58.42,2.7 60.23,0.89 67.86,0.89 | U$11.P$7 U$11.P$8 59,2.12 | U$12.A 73.51,10.47 74.17,9.82 C21.2
  other vias: 67.94,5.66
  cutout Bottom: 82.3,12.48 82.3,2.32 79.76,2.32 79.76,4.86 74.68,4.86 74.68,4.23 74.17,4.23 74.17,11.21 74.93,11.21 74.93,10.07 79.5,10.07 79.5,12.48
  cutout Top: 82.3,12.48 82.3,7.53 81.03,6.26 81.03,5.37 74.68,5.37 74.68,4.23 73.15,4.23 73.15,11.59 74.8,11.59 74.8,9.94 79.63,9.94 79.76,10.07 79.76,12.48
  pour Bottom (no thermals): 89.15,22.77 89.15,-0.09 34.54,-0.09 34.54,22.77 44.7,22.77 44.7,4.99 56.13,4.99 56.13,13.88 73.91,13.88 73.91,4.86 75.56,4.86 75.56,1.69 78.61,1.69 78.87,1.94 78.87,4.74 82.17,4.74 82.3,4.86 82.3,14.26 74.68,14.26 74.68,22.77
ID1  (via drill 0.35)
  Top 0.152: v16.51,22.9 15.2,22.9 U$1.15
  Bottom 0.152: R_I1.1 26.67,13.74 SW1.P$8 24.41,16.53 23.57,15.68 16.52,15.68 15.9,16.3 15.9,16.8 16.51,17.4 v16.51,22.9
  other vias: 26.67,16.53
ID2  (via drill 0.35)
  Top 0.152: SW1.P$7 28.07,16.65 28.07,18.63 26.21,20.48 20.23,20.48 U$1.18
  Bottom 0.152: R_I1.2 27.42,16.01 SW1.P$7
  other vias: 27.94,16.53
ID3  (via drill 0.35)
  Top 0.152: SW1.P$6 29.21,18.25 26.46,20.99 20.83,20.99 18.7,23.12 U$1.19
  Bottom 0.152: R_I1.3 27.92,15.24 SW1.P$6
  other vias: 29.21,16.53
ID4  (via drill 0.35)
  Top 0.152: SW1.P$5 30.48,17.74 26.77,21.45 21.53,21.45 U$1.20
  Bottom 0.152: R_I1.4 30.48,15.55 SW1.P$5
  other vias: 30.48,16.53
M  (via drill 0.35)
  other vias: 53.59,63.41 53.59,62.14 53.59,60.87 53.59,59.6 53.59,58.33 53.59,57.06 53.59,55.79 53.59,54.52 53.59,53.25 49.78,53.25 49.78,54.52 51.05,54.52 51.05,53.25 49.78,55.79 51.05,55.79
  pour Top (no thermals): 52.32,81.19 52.32,57.06 48.77,57.06 48.77,52.49 58.42,52.49 58.42,81.19
  pour Bottom (no thermals): 48.77,57.06 48.77,52.49 54.48,52.49 54.48,65.44 52.32,65.44 52.32,57.06
  pour Bottom: 48.77,53.25 48.77,49.44 54.48,49.44 54.48,53.25
N$1
  Top 0.254: U$1.3 13.59,31.66 12.45,31.66 OSC1.P$1
N$2
  Top 0.254: OSC1.P$3 14.1,33.4 14.1,32.28 U$1.2
N$3
  Top 0.152: U$1.31 20.12,33.48 R2.1
N$4  (via drill 0.35)
  Top 0.152: U$9.G_K 44.5,13.8 44.58,13.88 44.58,14.9 v45.51,15.83 | v68.71,19.98 68.64,19.91 U$8.6
  Bottom 0.152: v68.71,19.98 68.83,19.98 69.67,19.14 69.67,16.67 68.58,15.58 54.69,15.58 54.07,14.96 49.54,14.96 48.67,15.83 v45.51,15.83
N$5  (via drill 0.35)
  Top 0.152: U$8.4 68.51,18.01 v68.83,17.69 | v44.32,16.29 43.43,15.4 U$9.R_K
  Bottom 0.152: v68.83,17.69 69.29,17.23 69.29,16.72 68.45,15.89 54.56,15.89 54.2,15.53 49.4,15.53 48.51,16.42 44.45,16.42 v44.32,16.29
N$6  (via drill 0.35)
  Top 0.508: v75.56,12.86 71.63,12.86 v70.1,11.34 | L1.P$1 77.09,12.1 v77.09,12.86
  Bottom 0.508: v70.1,11.34 70.1,10.26 70.64,9.72 70.64,8.39 70.4,8.15 70.38,8.15 IC3.6
  other vias: 78.74,12.86 78.74,10.83 77.09,10.83 75.56,10.83
  pour Bottom: 79.38,13.88 79.38,10.2 75.06,10.2 75.06,13.88
N$7  (via drill 0.35)
  Top 0.152: R1.2 22.44,10.25 IC1.P$8
  other vias: 22.44,12.74
N$8  (via drill 0.35)
  Top 0.152: v45.21,12.48 46.9,12.48 U$9.B_A
  Bottom 0.152: R_I2.1 45.33,12.61 v45.21,12.48
N$9  (via drill 0.35)
  Top 0.152: U$9.G_A 45.51,13.8 v45.21,13.5
  Bottom 0.152: v45.21,13.5 46.38,13.5 R_I2.2
N$10  (via drill 0.35)
  Top 0.152: v45.34,14.64 45.85,15.15 U$9.R_A
  Bottom 0.152: R_I2.3 45.7,14.28 v45.34,14.64
N$11  (via drill 0.35)
  Top 0.152: v67.06,24.8 66.71,24.46 R_I3.1
  Bottom 0.152: U$10.4 67.59,24.26 v67.06,24.8
N$12  (via drill 0.35)
  Top 0.152: R_I3.4 67.34,20.86 v67.56,20.86
  Bottom 0.152: v67.56,20.86 67.56,21.79 U$10.6
N$13  (via drill 0.35)
  Top 0.152: R4.2 41.74,7.57 IC_3.1
  other vias: 41.74,8.8
N$16  (via drill 0.35)
  Top 0.152: v42.16,3.72 IC_1.PIN1
  Bottom 0.152: R5.2 42.16,4.95 v42.16,3.72
N$17  (via drill 0.35)
  Bottom 0.203: R19.2 IC_2.1_A
  other vias: 81.48,15.15
N$18  (via drill 0.35)
  Bottom 0.203: IC_2.2_A R23.2
  other vias: 81.48,17.69
N$19  (via drill 0.35)
  Top 0.152: C11.1 50.22,23.63 U$7.PIN16
  other vias: 50.63,24.04
N$20  (via drill 0.35)
  Top 0.152: U$7.PIN15 49.57,23.4 C11.2
  other vias: 48.93,24.04
N$21
  Top 0.152: C12.2 52.82,30.04 U$7.PIN9
N$22
  Top 0.152: U$7.PIN6 54.77,30.27 C13.2
N$23  (via drill 0.35)
  Top 0.406: U$7.PIN8 v53.47,28.48
  Bottom 0.406: v53.47,28.48 54.01,27.94 C14.2
N$24
  Bottom 0.152: R20.1 C22.2 R21.2 72.29,5.11 IC3.3
N$25
  Bottom 0.203: R17.2 37.5,72.3 TR4.1 40.89,73.57 R13.2
N$26
  Bottom 0.203: R14.2 40.89,50.71 TR2.1
  Bottom 0.254: R18.2 38.77,49.44 TR2.1
N$27
  Bottom 0.203: R15.2 61.63,49.44 TR1.1 63.75,50.71 R11.2
N$28
  Bottom 0.203: R16.2 60.36,72.3 TR3.1 63.75,73.57 R12.2
N$31  (via drill 0.35)
  Top 0.152: IC3.4 R22.1
  other vias: 69.68,9.05 69.69,5.56
NRST  (via drill 0.35)
  Top 0.152: U$3.12 26.65,30.09 v26.65,30.5 | U$1.4 13.21,30.9 11.69,30.9 U$2.P$2 | v26.67,32.14 23.78,32.14 22.86,33.06 22.86,35.95 21.94,36.87 v18.7,36.87
  Top 0.254: C8.1 9.53,34.41 U$2.P$2
  Bottom 0.152: v26.65,30.5 26.65,32.12 v26.67,32.14 | v18.7,36.87 8.89,36.87 8.22,36.19 C8.1
  other vias: 8.22,35.72
PWM  (via drill 0.35)
  Top 0.203: U$1.14 14.32,23.24 v15.24,24.17
  Bottom 0.203: v15.24,24.17 14.61,23.53 14.61,12.24 21.73,5.12 CON2.P$5
PWM1  (via drill 0.35)
  Top 0.152: U$7.PIN23 54.77,20.97 52.33,18.52 R_I4.1 51.6,17.59 49.66,15.64 v49.66,12.74 | v49.66,7.4 49.66,6.77 48.77,5.88 IC_3.5
  Bottom 0.152: v49.66,7.4 v49.66,12.74
PWM_IN
  Bottom 0.152: CON4.P$5 38.1,10.32 39.62,8.8 R4.1
RDEAD
  Top 0.152: U$7.PIN27 57.4,22 57.4,20.23 58.04,19.59 59.94,19.59 | 59.94,19.59 61.59,19.59 61.67,19.67 R_I5.1 | R7.1 59.94,19.59
RESET  (via drill 0.35)
  Top 0.203: U$1.13 14.61,24.57 v14.61,24.93
  Bottom 0.203: v14.61,24.93 14.73,24.8 15.5,24.8 15.87,24.43 15.87,23.53 15.11,22.77 15.11,12.45 CON2.P$6
RESET1  (via drill 0.35)
  Top 0.152: U$7.PIN24 55.42,19.52 54.44,18.54 | 54.44,18.54 54.44,18.58 52.92,18.58 51.94,17.6 51.94,16.93 50.29,15.28 50.29,13.5 v50.42,13.37 | 54.44,18.54 R8.1 | IC_1.PIN4 48.58,2.9 48.64,2.96 48.64,4.99 v50.42,6.77
  Bottom 0.152: v50.42,13.37 v50.42,6.77
  other vias: 54.44,17.69
RESET_IN
  Bottom 0.152: CON4.P$6 37.18,7.53 38.35,7.53 40.04,5.84 R5.1
SA  (via drill 0.35)
  Top 0.152: U$7.PIN11 51.52,30.34 C12.1
  Bottom 0.203: R14.1 44.28,49.44 TR2.3
  Bottom 0.254: C12.1 50.93,30.39 50.16,31.15 35.33,31.15 35.33,51.73 36.22,52.62 43.01,52.62 R14.1
  other vias: 51.47,30.39 47.24,64.68 47.24,63.41 47.24,62.14 47.24,60.87 47.24,59.6 47.24,58.33 45.97,57.06 44.7,57.06 43.43,57.06 42.16,57.06 40.89,57.06 39.62,57.06 38.35,57.06 37.08,58.33 37.08,59.6 37.08,60.87 37.08,62.14 37.08,63.41 37.08,64.68 39.62,64.68 39.62,63.41 39.62,62.14 39.62,60.87 39.62,59.6 40.89,59.6 42.16,59.6 43.43,59.6 44.7,59.6 44.7,60.87 44.7,62.14 44.7,63.41 44.7,64.68 53.59,45.63 53.59,44.36 52.32,45.63 52.32,44.36 51.05,45.63 51.05,44.36 49.78,44.36 51.05,64.68 51.05,63.41 51.05,62.14 51.05,60.87 49.78,64.68 49.78,63.41 49.78,62.14 49.78,60.87 37.08,51.98 38.35,51.98 44.7,51.98 45.97,51.98 47.24,51.98 53.59,48.17 52.32,48.17 44.7,49.44 38.35,53.25 37.08,53.25 37.08,50.71 37.08,49.44 43.43,51.98 43.43,50.71 43.43,49.44 43.43,48.17 43.43,46.9 44.7,46.9 44.7,48.17 44.7,50.71 45.97,50.71 47.24,50.71 42.16,62.14 42.16,63.41 42.16,64.68
  pour Bottom (no thermals): 51.94,65.44 34.54,65.44 34.54,46.52 37.59,46.52 37.59,43.09 45.97,43.09 45.97,49.44 48.26,49.44 48.26,57.44 51.94,57.44
  pour Bottom (no thermals): 54.48,49.06 54.48,43.09 44.7,43.09 44.7,45.12 49.78,45.12 49.78,46.65 51.18,46.65 51.18,49.06
  pour Top (no thermals): 34.54,65.44 34.54,46.52 45.97,46.52 45.97,49.44 48.64,49.44 48.64,43.09 54.48,43.09 54.48,51.98 48.26,51.98 48.26,57.44 51.94,57.44 51.94,65.44
SB  (via drill 0.35)
  Top 0.152: C13.1 56.13,30.18 56.13,27.29 U$7.PIN4
  Top 0.254: C13.1 56.96,31 v58.67,31
  Bottom 0.203: R11.1 66.29,50.71 67.31,49.69 TR1.3
  Bottom 0.254: v67.56,48.17 TR1.3 | v58.67,31 58.87,30.8 71.21,30.8 72.24,31.83 72.24,49.21 71.75,49.69 67.31,49.69
  other vias: 70.1,64.68 70.1,63.41 70.1,62.14 70.1,60.87 70.1,59.6 70.1,58.33 68.83,57.06 67.56,57.06 66.29,57.06 65.02,57.06 63.75,57.06 62.48,57.06 61.21,57.06 59.94,58.33 59.94,59.6 59.94,60.87 59.94,62.14 59.94,63.41 59.94,64.68 62.48,64.68 62.48,63.41 62.48,62.14 62.48,60.87 62.48,59.6 63.75,59.6 65.02,59.6 66.29,59.6 67.56,59.6 67.56,60.87 67.56,62.14 67.56,63.41 67.56,64.68 67.56,49.44 65.02,64.68 65.02,63.41 65.02,62.14 71.37,51.98 70.1,51.98 68.83,51.98 67.56,51.98 67.56,50.71 68.83,50.71 70.1,50.71 71.37,50.71 71.37,48.17 70.1,48.17 68.83,48.17 67.56,46.9 68.83,46.9 70.1,46.9 71.37,46.9 67.56,44.36 68.83,44.36 70.1,44.36 57.4,49.44 56.13,50.71 57.4,50.71 56.13,49.44 56.13,45.63 57.4,45.63 56.13,44.36 57.4,44.36 58.67,44.36
  pour Top (no thermals): 65.66,81.19 58.93,81.19 58.93,51.98 54.86,51.98 54.86,43.09 72.26,43.09 72.26,77 65.66,77
  pour Bottom (no thermals): 54.86,65.44 54.86,43.09 72.26,43.09 72.26,65.44
SENS_VCC  (via drill 0.35)
  Top 0.254: v45.51,45.88 45.3,45.68 37.26,45.68 35.76,44.19 35.76,29.93 v36.83,28.87
  Top 0.508: v35.81,22.77 35.05,22.01 35.05,13.88 36.11,12.82 CON4.P$4
  Bottom 0.254: U$5.P$8 46.61,46.18 C18.2 45.63,46.01 v45.51,45.88
  Bottom 0.508: IC2.5 41.84,21.27 C20.1 41.74,23.19 40.89,24.04 | 40.89,24.04 40.89,27.85 39.88,28.87 v36.83,28.87 | 40.89,24.04 38.35,24.04 37.08,22.77 v35.81,22.77
T_JCLK/SWCLK
  Top 0.152: U$1.24 23.04,24.47 27.8,24.47 U$3.6
T_JTDI
  Top 0.152: U$3.10 22.29,27.34 U$1.25
T_JTDO/SWO
  Top 0.152: U$3.8 27.5,26.71 21.59,26.71 20.32,27.98 20.32,28.02 U$1.26
T_JTMS/SWDIO
  Top 0.152: U$1.23 22.21,24.17 26.67,24.17 27.3,23.53 U$3.4
T_VCP_RX
  Top 0.152: U$3.13 27.75,31.53 19.31,31.53 U$1.30
T_VCP_TX
  Top 0.152: U$3.14 26.86,31.15 20.06,31.15 U$1.29
V5  (via drill 0.35)
  Top 0.152: IC_3.6 47.59,7.19 C10.1 | v62.48,22.77 63.27,21.99 R_I5.5 | R_I5.6 62.72,22.54 v62.48,22.77 | R_I5.7 62.22,22.5 v62.48,22.77 | R_I4.5 49.81,20.12 49.7,20.02 v49.7,19.59 49.73,19.57 R_I4.6
  Top 0.406: U$7.PIN20 52.82,20.31 C9.1 | v72.26,23.66 72.52,23.66 74.42,25.56 79.5,25.56 80.39,24.68 80.39,23.28 80.9,22.77 IC_2.4_A 82.42,22.77 82.68,22.52 82.68,20.74 82.17,20.23 IC_2.3_A | v52.78,17.65 52.78,14.36 v52.7,14.28
  Bottom 0.152: C9.1 52.11,19.59 v49.7,19.59
  Bottom 0.406: C9.1 R8.2 v52.78,17.65 | v72.26,23.66 70.1,21.5 70.1,16.42 68.83,15.15 54.86,15.15 53.99,14.28 v52.7,14.28 R_I2.6 R_I2.7 R_I2.8 48.09,9.44 C10.1
  other vias: 52.74,20.23 47.59,8.93
  pour Bottom (no thermals): 54.86,6.26 45.97,6.26 45.97,22.77 57.78,22.77 57.78,23.91 72.64,23.91 72.64,15.15 54.86,15.15
VCC
  cutout Bottom: 34.54,29.12 37.34,29.12 37.34,46.14 34.54,46.14
VDD  (via drill 0.35)
  Top 0.254: U$7.PIN1 58.02,29.49 59.28,30.74 59.28,31.25 58.92,31.6 58.86,31.6 53.59,36.87 v53.59,39.28
  Top 0.406: U$7.PIN13 50.22,28.13 49.95,28.41 47.53,28.41 C24.1 v47.24,29.12
  Bottom 0.203: C17.1 C16.1 C15.1 77.72,63.83 v77.72,64.68 v77.72,68.49 v77.72,69.76 v77.72,71.03 77.72,77.38 75.89,79.21 U$6.P$4
  Bottom 0.406: C17.1 78.99,38.86 78.99,29.68 47.55,29.68 47.24,29.37 v47.24,29.12
  other vias: 42.16,38.01 70.1,78.65 70.1,79.92 71.37,79.92 71.37,78.65 72.64,78.65 72.64,79.92 73.91,69.76 73.91,68.49 75.18,68.49 75.18,69.76 76.45,69.76 76.45,71.03 76.45,68.49 73.91,64.68 75.18,64.68 76.45,64.68 77.72,62.14 76.45,62.14 75.18,62.14 73.91,62.14 73.91,59.6 75.18,59.6 76.45,59.6 77.72,59.6 77.72,53.25 76.45,53.25 75.18,53.25 73.91,53.25 73.91,50.71 75.18,50.71 76.45,50.71 77.72,50.71 77.72,48.17 76.45,48.17 75.18,48.17 73.91,48.17 73.91,41.82 75.18,41.82 76.45,41.82 77.72,41.82 77.72,39.28 76.45,39.28 75.18,39.28 73.91,39.28 73.91,36.74 75.18,36.74 76.45,36.74 77.72,36.74 70.1,41.82 70.1,40.55 70.1,39.28 70.1,38.01 70.1,36.74 70.1,35.47 68.83,34.2 67.56,34.2 66.29,34.2 65.02,34.2 63.75,34.2 62.48,34.2 61.21,34.2 59.94,35.47 59.94,36.74 59.94,38.01 59.94,39.28 59.94,40.55 59.94,41.82 62.48,41.82 62.48,40.55 62.48,39.28 62.48,38.01 62.48,36.74 63.75,36.74 65.02,36.74 66.29,36.74 67.56,36.74 67.56,38.01 67.56,39.28 67.56,40.55 67.56,41.82 65.02,41.82 65.02,40.55 65.02,39.28 57.4,41.82 57.4,40.55 57.4,39.28 57.4,38.01 56.13,38.01 56.13,39.28 56.13,40.55 56.13,41.82 51.05,41.82 51.05,40.55 51.05,39.28 51.05,38.01 49.78,38.01 49.78,39.28 49.78,40.55 49.78,41.82 47.24,41.82 47.24,40.55 47.24,39.28 47.24,38.01 47.24,36.74 47.24,35.47 45.97,34.2 44.7,34.2 43.43,34.2 42.16,34.2 40.89,34.2 39.62,35.47 39.62,36.74 39.62,38.01 39.62,39.28 39.62,40.55 39.62,41.82 42.16,41.82 42.16,40.55 42.16,39.28 42.16,36.74 43.43,36.74 44.7,36.74 44.7,38.01 44.7,39.28 44.7,40.55 44.7,41.82
  pour Top (no thermals): 66.29,81.19 80.14,81.19 80.14,32.93 37.47,32.93 37.47,42.71 72.64,42.71 72.64,77.38 66.29,77.38
  pour Bottom (no thermals): 66.29,81.19 66.29,77.38 72.64,77.38 72.64,42.71 34.54,42.71 34.54,32.93 80.14,32.93 80.14,81.19
VDDA  (via drill 0.35)
  Top 0.254: C6.1 13.55,29.43 U$1.5
  Bottom 0.254: C6.1 13.55,25.4 12.82,24.67 12.82,11.72 16.89,7.66 17.53,7.66 18.63,6.55 C7.1 18.72,6.29 18.72,3.84 CON2.P$4
  other vias: 13.55,27.98
VDSTH  (via drill 0.35)
  Top 0.152: v58.04,20.48 58.02,20.48 U$7.PIN28 | v63.37,19.47 63.52,19.62 63.52,20.19 R_I5.4
  Bottom 0.152: v58.04,20.48 59.78,20.48 R6.1 60.41,20.65 61.59,19.47 v63.37,19.47
VIOUT
  Top 0.305: CON2.P$2 14.23,5.11 11.81,7.53 11.81,24.04 U$1.11
VIOUT1  (via drill 0.35)
  Top 0.254: U$5.P$7 47.88,46.74 46.01,44.87 37.59,44.87 36.58,43.85 36.58,30.75 39.6,27.72 39.6,25.29 38.55,24.23 38.55,19.47 CON4.P$2
  other vias: 47.88,48.01

## Text on the board
tPlace: 0.hayate | System | MotaDora | CH_B / 5V / CH_A / CH_Z / GND | 0.hayate / MotaDora_MCU
bPlace: GND | V_bat